# Altium PCB PCB2.PcbDoc
Units mm, origin at the board's own origin, x right, y up, seen from the top; angles counter-clockwise.
Board outline 42.3 x 42.3 mm, 2 copper layers (Top Layer, Bottom Layer); 22 components, 19 nets, 97 pads, 76 vias.
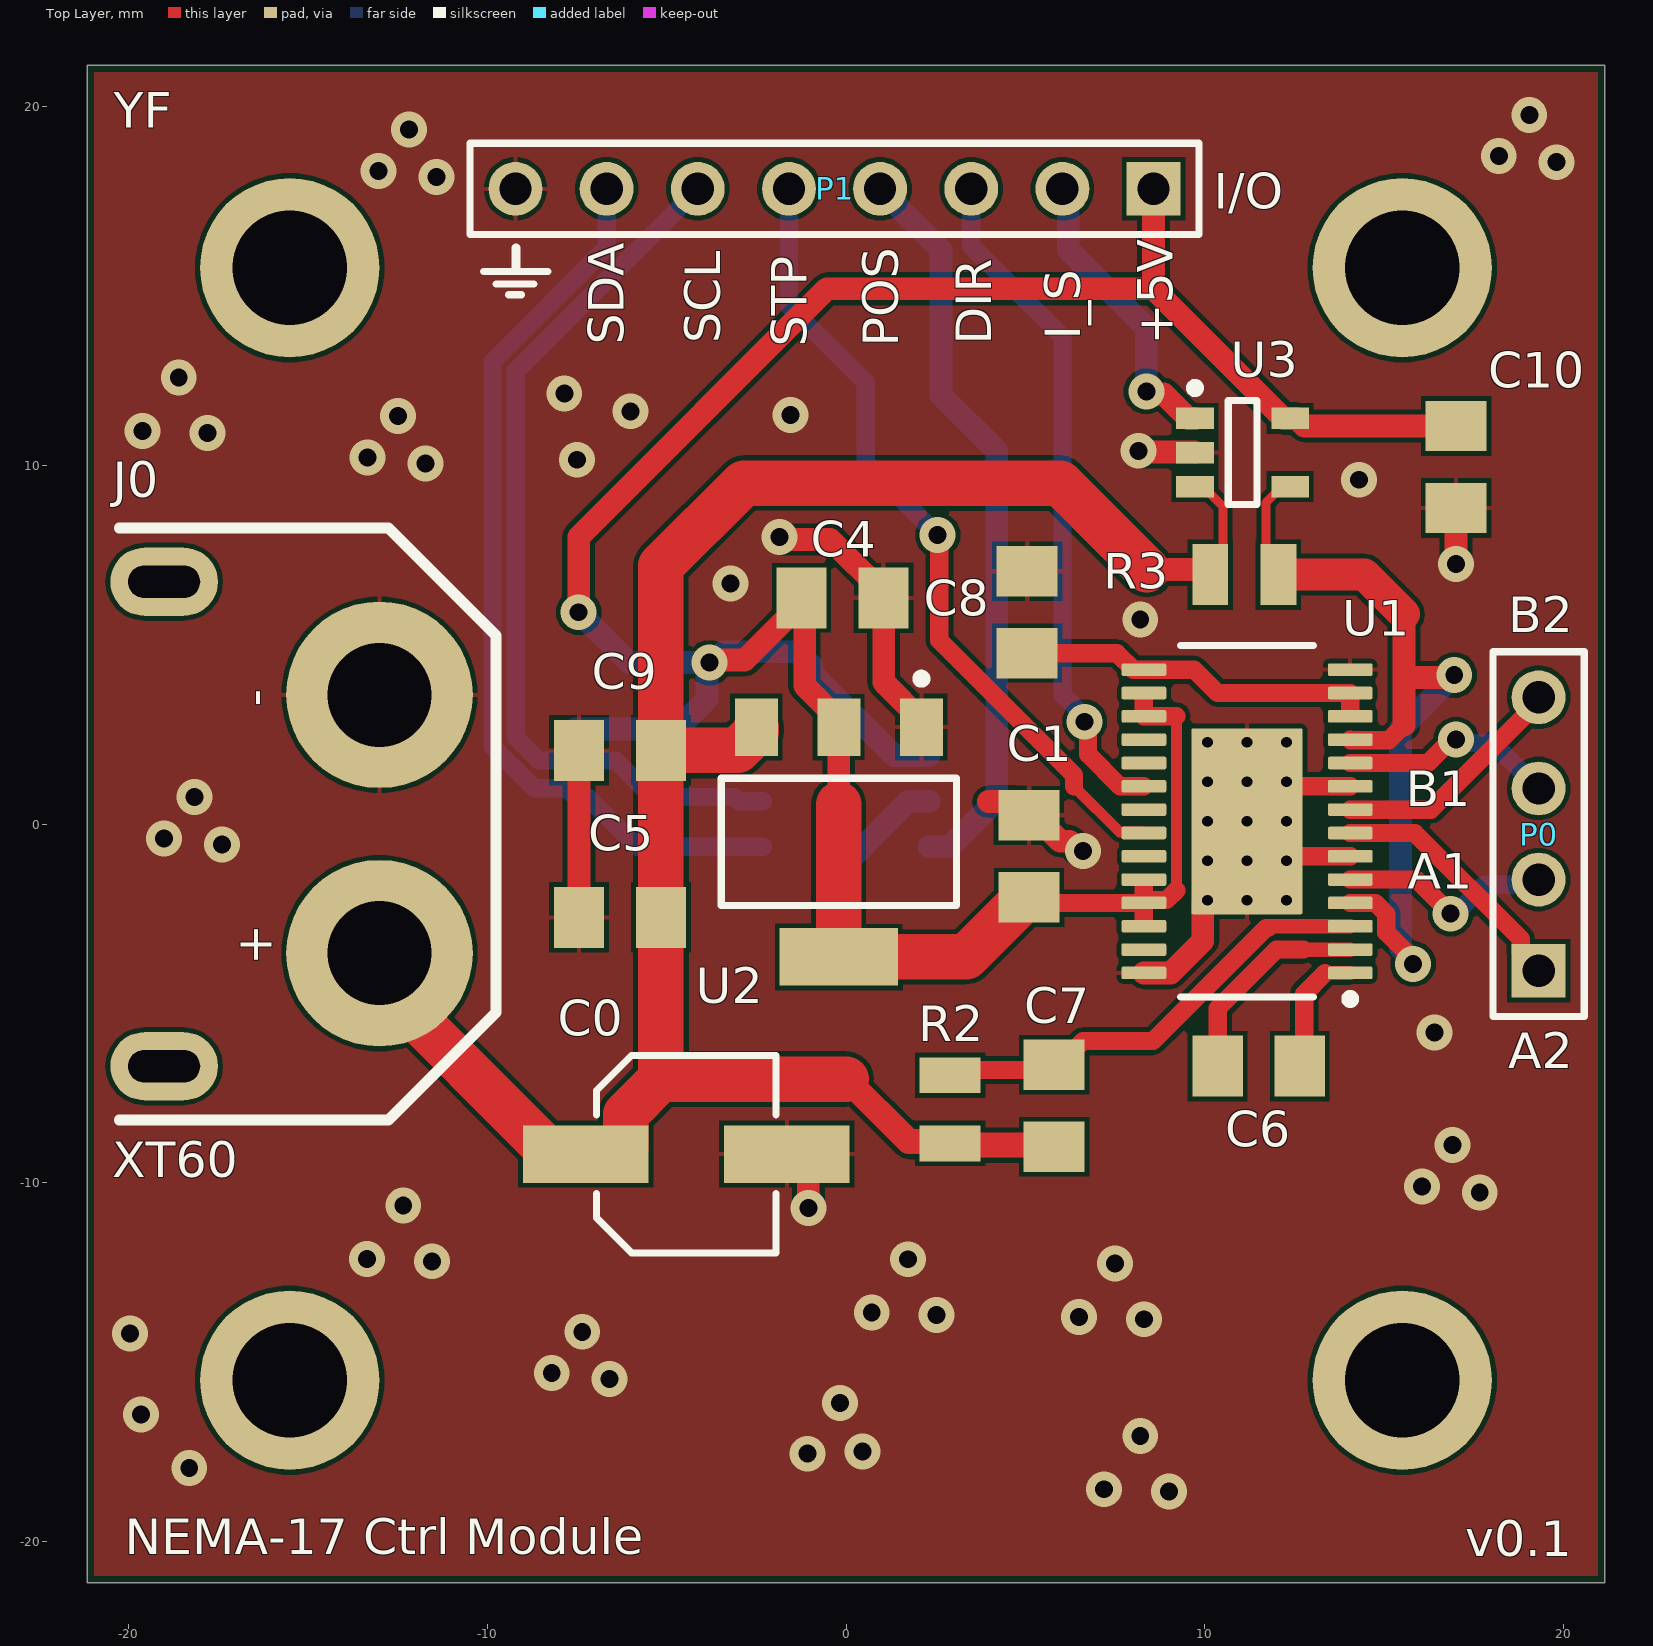
[diagram p0: Top Layer view]
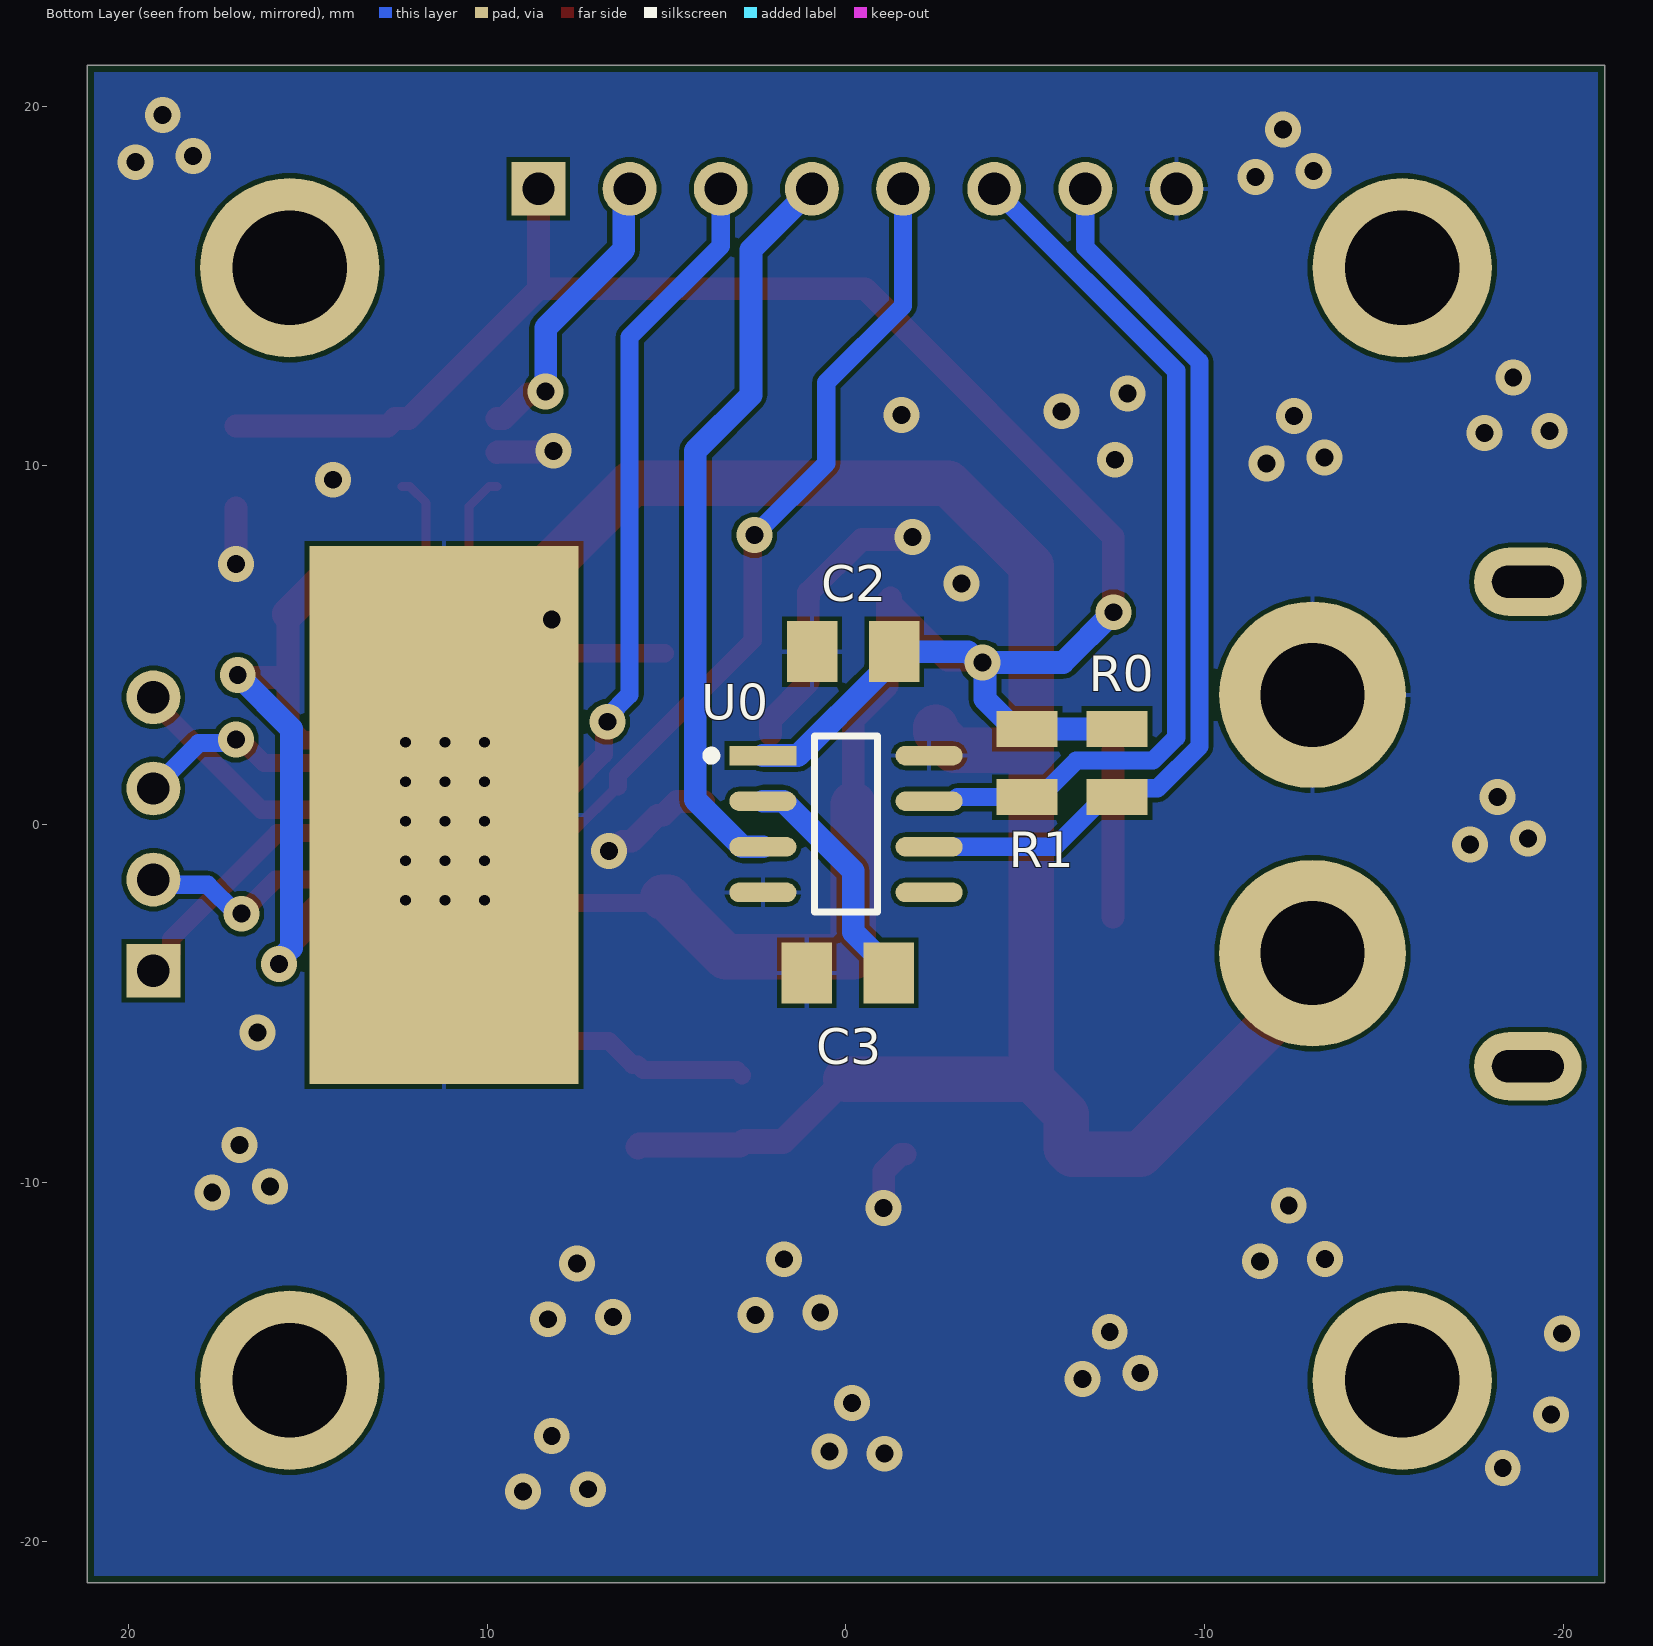
[diagram p1: Bottom Layer view, seen from below]
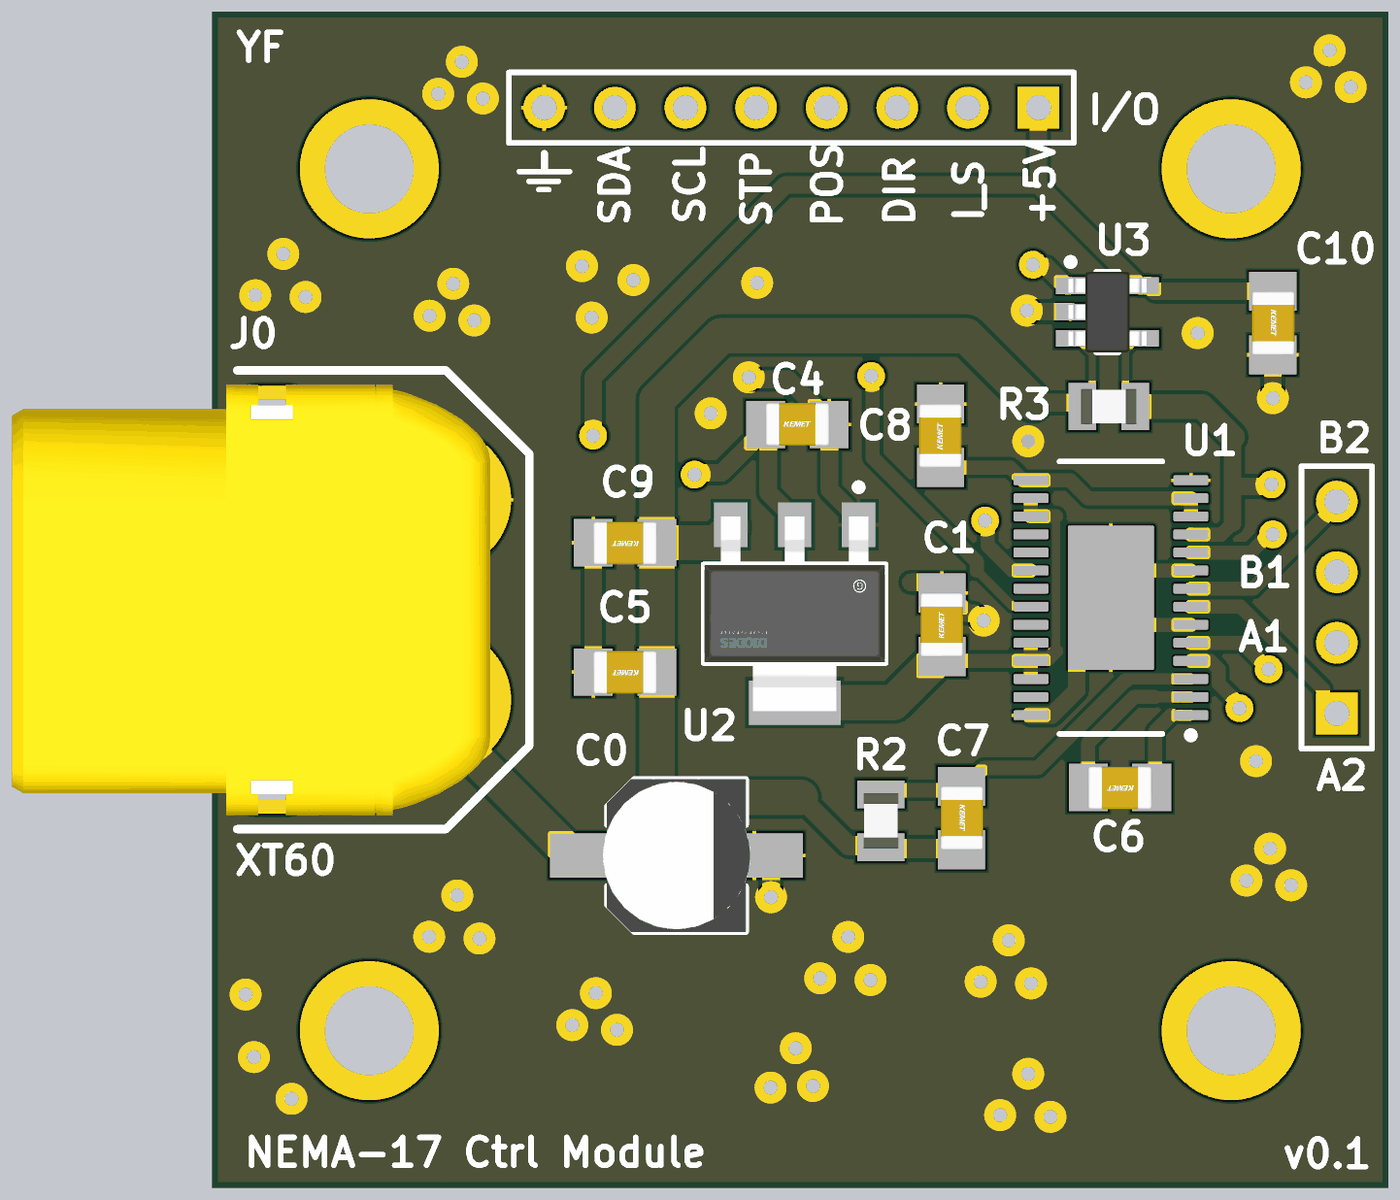
[diagram p2: 3D render of the assembled board from above, using the file's embedded part models]
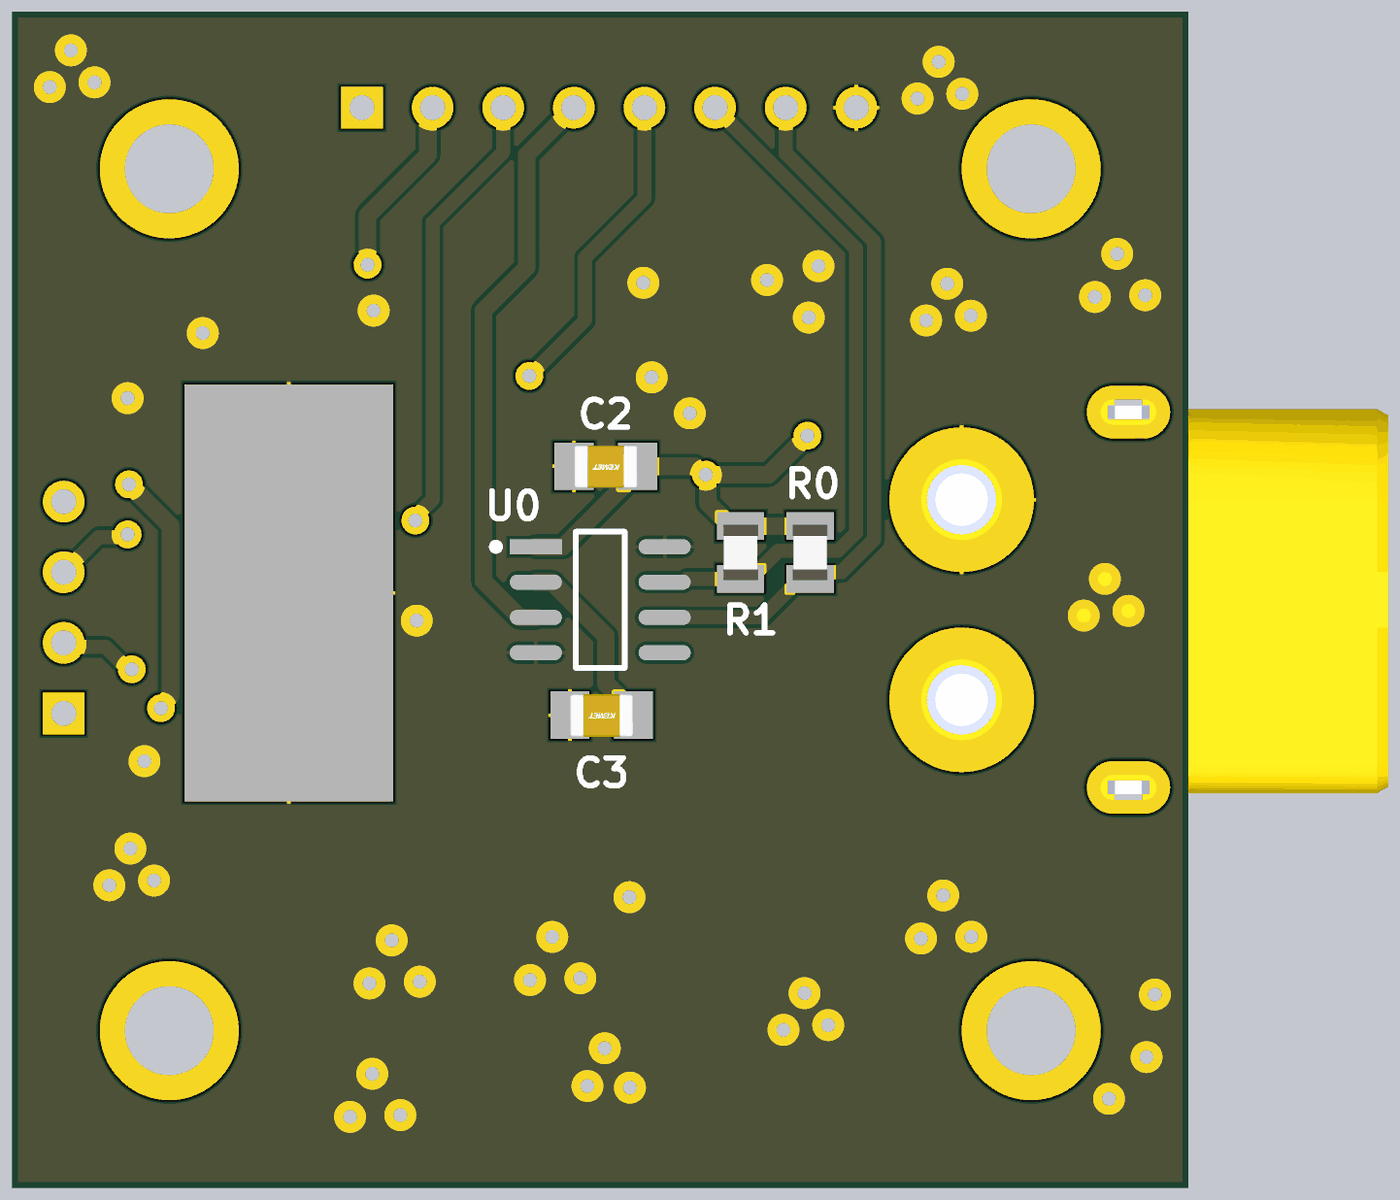
[diagram p3: 3D render of the assembled board from below, using the file's embedded part models]

## Layer stack, top to bottom
Top Solder: solder mask 0.0102, Solder Resist, Dk 3.5
Top Layer: signal copper 0.0356
Dielectric 1: dielectric 0.32, FR-4, Dk 4.8
Bottom Layer: signal copper 0.0356
Bottom Solder: solder mask 0.0102, Solder Resist, Dk 3.5

## Board outline
-21.15,-21.15 21.15,-21.15 21.15,21.15 -21.15,21.15

## Design rules (kind name [scope] priority, off if disabled: settings)
BoardOutlineClearance [All] p1: gap=0.2 ignorepadtopadclearanceinfootprint=FALSE
Clearance [All] p1: gap=0.127 ignorepadtopadclearanceinfootprint=FALSE except(0.25: Arc-Hole Track-Hole SMDPad-Hole THPad-Hole Via-Hole Fill-Hole Poly-Hole Region-Hole Text-Hole)
ComponentClearance [All] p1: gap=0.127 collisioncheckmode=3 verticalgap=0.127 showdistances=TRUE
DiffPairsRouting [All] p1: maxlimit=0.254 minlimit=0.127 mostfreqgap=0.127 toplayer_minwidth=0.127 toplayer_maxwidth=25.4 toplayer_prefwidth=0.127 bottomlayer_minwidth=0.127 bottomlayer_maxwidth=25.4 bottomlayer_prefwidth=0.127 maxuncoupledlength=12.7
Height [All] p1: minheight=0 maxheight=1816.048 prefheight=12.7
HoleSize [All] p1: absolutevalues=TRUE maxlimit=6.3 minlimit=0.3 maxpercent=80.000 minpercent=20.000
HoleToHoleClearance [All] p1: gap=0.25 allowstackedmicrovias=FALSE
MinimumAnnularRing [All] p1: minimumring=0.076
MinimumSolderMaskSliver [All] p1: minsoldermaskwidth=0
PlaneClearance [All] p1: clearance=0.127
PlaneConnect PlaneConnectPowerPads [InPadClass('PowerPads')] p1: planeconnectstyle=Direct reliefexpansion=0.508 reliefentries=4 reliefconductorwidth=0.254 reliefairgap=0.254
PlaneConnect [All] p2: pad.planeconnectstyle=Relief pad.reliefexpansion=0.3 pad.reliefentries=4 pad.reliefconductorwidth=0.127 pad.reliefairgap=0.127 via.planeconnectstyle=Direct via.reliefexpansion=0.3 via.reliefentries=4 via.reliefconductorwidth=0.127 via.reliefairgap=0.127
PolygonConnect PolygonConnectPowerPads [All vs (InPadClass('PowerPads'))] p1: connectstyle=Direct reliefconductorwidth=0.254 reliefentries=4 polygonreliefangle="90 Angle" airgapwidth=0.254
PolygonConnect [All] p2: thpad.connectstyle=Relief thpad.reliefconductorwidth=0.127 thpad.reliefentries=4 thpad.polygonreliefangle="90 Angle" thpad.airgapwidth=0.127 smdpad.connectstyle=Relief smdpad.reliefconductorwidth=0.127 smdpad.reliefentries=4 smdpad.polygonreliefangle="90 Angle" smdpad.airgapwidth=0.127 via.connectstyle=Direct via.reliefconductorwidth=0.127 via.reliefentries=4 via.polygonreliefangle="90 Angle" via.airgapwidth=0.127
RoutingVias [All] p1: holewidth=0.3 width=0.6 viastyle="Through Hole" minholewidth=0.3 minwidth=0.6 maxholewidth=0.6 maxwidth=6.6
SilkToSilkClearance [All] p1: silktosilkclearance=0
SilkToSolderMaskClearance [IsPad] p1: minsilkscreentomaskgap=0.127 clearancetoexposedcopper=TRUE
SolderMaskExpansion [All] p1: expansion=0.075 istentingtop=FALSE
Width [All] p1: maxlimit=25.4 minlimit=0.127 preferedwidth=0.127 minimp=50.000000 maximp=50.000000 favimp=50.000000
20 further rules are at their usual default settings.

## Components (designator, comment, footprint, x,y, rotation, side; value= is the part's Value field where it differs from the comment)
C0 "100u" CAP-EL-NP-5MM -4.45,-9.2 r0 top
C1 "22uF" CAP_0805 5.1,-0.9 r90 top
C2 "1uF" CAP_0805 -0.2,4.8 r0 bottom
C3 "0.1uF" CAP_0805 -0.05,-4.15 r0 bottom
C4 "0.1uF" CAP_0805 -0.1,6.3 r0 top
C5 "0.1uF" CAP_0805 -6.3,-2.6 r180 top
C6 "0.01uF" CAP_0805 11.5,-6.75 r180 top
C7 "0.1uF" CAP_0805 5.8,-7.85 r270 top
C8 "0.1uF" CAP_0805 5.05,5.9 r90 top
C9 "10uF" CAP_0805 -6.3,2.05 r180 top
C10 "0.1uF" CAP_0805 17,9.95 r270 top
J0 "XT60PW-F" XT60PW-F -16,0 r90 top
P0 "Stepper" HDR1X4 19.3,-4.09 r90 top
P1 "Header 8" HDR1X8 8.57,17.7 r180 top
R0 "R0805" RES_0805 -7.55,1.7 r270 bottom
R1 "R0805" RES_0805 -5.05,1.7 r270 bottom
R2 "1M" RES_0805 2.9,-7.95 r270 top
R3 ".5" RES_0805 11.1,6.95 r180 top
U0 "AS5600-ASOM" FP-AS5600-ASOM-IPC_C 0,0 r180 bottom
U1 "DRV8825PWP" PWP0028C_L 11.175,0.075 r180 top
U2 "AZ1117CH-5.0TRG1" FP-SOT223-MFG -0.2,-0.5 r270 top
U3 "INA180A1IDBVR" SOT-23-5 11.05,10.35 r0 top

## Footprints (in the part's own frame and the unit in brackets; to place one, negate y for a bottom-side part, rotate by r counter-clockwise, add the part's x,y. Pads: shape width x height; smd on the part's side, far side on the other; paste and mask are expansions set on the pad)
CAP-EL-NP-5MM [mm]
  rect 3.5x1.6 smd: 1(-2.8,0) 2(2.8,0)
  silkscreen extent -2.5,-2.75 2.5,2.75, body extent -2.65,-2.75 2.65,2.75, height 6.1
CAP_0805 [mm]
  rect 1.4x1.7 smd: 1(-1.143,0) 2(1.143,0)
  body extent -1.15,-0.76 1.15,0.79, height 1.01
FP-AS5600-ASOM-IPC_C [mm]
  rect 1.874x0.542 smd paste+0 mask+0: 1(-2.316,1.905)
  rrect100% 1.874x0.542 smd paste+0 mask+0: 2(-2.316,0.635) 3(-2.316,-0.635) 4(-2.316,-1.905) 5(2.316,-1.905) 6(2.316,-0.635) 7(2.316,0.635) 8(2.316,1.905)
  silkscreen extent -3.88,-2.45 0.88,2.45
FP-SOT223-MFG [mm]
  rect 1.6x1.2 smd paste+0 mask+0: 1(-3.2,2.3) 2(-3.2,0) 3(-3.2,-2.3)
  rect 1.6x3.3 smd paste+0 mask+0: 4(3.2,0)
  silkscreen extent -4.67,-3.27 1.78,3.27, body extent -4.1,-3.37 4.1,3.37, height 0.25
HDR1X4 [mm] "Connector; Header; 4 Position"
  rect 1.5x1.5 hole 0.9: 1(0,0)
  round 1.5 hole 0.9: 2(2.54,0) 3(5.08,0) 4(7.62,0)
  silkscreen extent -1.27,-1.27 8.89,1.27
HDR1X8 [mm] "Connector; Header; 8 Position"
  rect 1.5x1.5 hole 0.9: 1(0,0)
  round 1.5 hole 0.9: 2(2.54,0) 3(5.08,0) 4(7.62,0) 5(10.16,0) 6(12.7,0) 7(15.24,0) 8(17.78,0)
  silkscreen extent -1.27,-1.27 19.05,1.27
PWP0028C_L [mm] "SOP, 28-Leads, Body 9.8x4.5mm, Pitch 0.65mm, Thermal Pad 5.18x3.1mm, IPC High Density"
  rrect29% 1.25x0.35 smd: 1(-2.875,4.225) 2(-2.875,3.575) 3(-2.875,2.925) 4(-2.875,2.275) 5(-2.875,1.625) 6(-2.875,0.975) 7(-2.875,0.325) 8(-2.875,-0.325) 9(-2.875,-0.975) 10(-2.875,-1.625) 11(-2.875,-2.275) 12(-2.875,-2.925) 13(-2.875,-3.575) 14(-2.875,-4.225) 15(2.875,-4.225) 16(2.875,-3.575) 17(2.875,-2.925) 18(2.875,-2.275) 19(2.875,-1.625) 20(2.875,-0.975) 21(2.875,-0.325) 22(2.875,0.325) 23(2.875,0.975) 24(2.875,1.625) 25(2.875,2.275) 26(2.875,2.925) 27(2.875,3.575) 28(2.875,4.225)
  rrect3% 3.1x5.18 smd: 29(0,0)
  silkscreen extent -3,-4.9 1.85,5.07, body extent -2.25,-4.9 2.25,4.9, height 1.2
RES_0805 [mm]
  rect 1x1.7 smd: 1(-0.95,0) 2(0.95,0)
  body extent -1,-0.63 1,0.63, height 0.47
SOT-23-5 [mm] "SOT23, 5-Leads, Body 2,90x2,80mm, Pitch 0,95mm, IPC Medium Density"
  rect 1.05x0.6 smd: 1(-1.325,0.95) 2(-1.325,0) 3(-1.325,-0.95) 4(1.325,-0.95) 5(1.325,0.95)
  silkscreen extent -1.45,-1.45 0.4,1.92, body extent -1.4,-1.45 1.4,1.45, height 1.45
XT60PW-F [mm]
  round 5.2 hole 2.9: 1(-3.6,-3) 2(3.6,-3)
  oval 1.9x3 hole 0.9 slot 2 at 90 deg: MH(-6.75,3) MH(6.75,3)
  silkscreen extent -8.25,-6.25 8.25,4.25, body extent -7.75,-4.85 7.75,12.35, height 8.41

## Part data
C0: library part CAP_EL_NP_5MM, "Capacitor SMD Electrolytic Non-Polarised 5mm Diameter - 12V", Manufacturer=Nichicon
C1 C2 C3 C4 C8 C10: library part CAP_0805_6V3, "Capacitor SMD 0805 6V3"
C5 C9: library part CAP_0805_6V3, "Capacitor SMD 0805 12V"
C6: library part CAP_0805_6V3, "Capacitor SMD 0805 50V"
C7: library part CAP_0805_6V3, "Capacitor SMD 0805 16V"
J0: "XT60 horizontal female 2-pin AMASS", Manufacturer=AMASS, Distributor Link=https://www.tme.eu/de/details/xt60pw-f/dc-steckverbinder/amass/, Manufacturer Part Number=XT60PW-F
P0: library part "Header 4", "Header, 4-Pin", LatestRevisionDate=17-Jul-2002, LatestRevisionNote="Re-released for DXP Platform.", Publisher="Altium Limited"
P1: "Header, 8-Pin", LatestRevisionDate=17-Jul-2002, LatestRevisionNote="Re-released for DXP Platform.", Publisher="Altium Limited"
R0 R1 R2 R3: library part RES_0805, "Resistor SMD 0805"
U0: library part CMP-22826-000002-1, "SENSOR ANGLE 360DEG SMD", Max Operating Temperature=125°C, Min Operating Temperature=-40°C, Lead Free="Lead Free", Mount="Surface Mount", Sensing Method="Hall Effect", Termination=SMD/SMT
U1: library part CMP-1685-00019-1, "Stepper Motor Controller IC, 8.2 to 45 V, -40 to 85 degC, 28-Pin HTSSOP (PWP), Green (RoHS & no Sb/Br), Tube", Capacitance="47 uF", Case\Package=Radial, Max Operating Temperature="85 degC", Min Operating Temperature="-40 degC", Package Quantity=200, Tolerance=20%, Voltage Rating="100 V", ComponentLink1Description="Manufacturer URL", ComponentLink1URL=http://www.ti.com/, ComponentLink2Description=Datasheet, ComponentLink2URL=http://www.ti.com/general/docs/lit/getliterature.tsp?genericPartNumber=DRV8825&fileType=pdf, DatasheetVersion="SLVSA73F, 07/2014", Diameter="8 mm", Height="11.5 mm", Lead Pitch="3.5 mm", Length="11.5 mm", Mount="Through Hole", PackageDescription="28-Pin Small Outline Package Integrated Circuit, Body 9.7 x 4.4 mm, Pitch 0.65 mm", PackageReference=PWP0028C, Packaging=Bulk, Pins=2, Radiation Hardening=No, REACH SVHC="No SVHC", RoHSCompliant=true, Voltage Rating (DC)="100 V", Width="8 mm"
U2: library part CMP-12756-000028-1, "IC REG LINEAR 3.3V 800MA SOT223", Case/Package=SOT-223, Dropout Voltage=1.2V, Max Input Voltage=15V, Max Operating Temperature=125°C, Max Output Current=1.35A, Min Current Limit=1A, Min Operating Temperature=-20°C, Output Current=800mA, Output Voltage=3.3V, Package Quantity=4000, Power Supply Rejection Ratio (PSRR)=70dB, Quiescent Current=6mA, Reference Voltage=1.262V, Accuracy=1%, Height=1.7mm, Lead Free="Lead Free", Length=6.7mm, Mount="Surface Mount", Number of Outputs=1, Number of Pins=4, Number of Regulators=1, Output Type=Fixed, Packaging="Tape and Reel", Polarity=Positive, Width=3.7mm

## Free pads (board coordinates)
  round 5 hole 3.2: 1(-15.5,-15.5) 1(-15.5,15.5) 1(15.5,-15.5) 1(15.5,15.5)
  rect 7.5x15 smd far side: 3(11.2,0.25)

## Via types
v1: diameter 1, hole 0.5, Top Layer to Bottom Layer, 61 vias
v2: diameter 0.6, hole 0.3, Top Layer to Bottom Layer, 15 vias

## Nets (pads, with @x,y where several pads share a name; then routed paths per layer and width w, separated by ;. In a path a pad name is that pad's centre, name@x,y a point inside that pad or via, vN(x,y) a via of type N, cw(c..) or ccw(c..) an arc to the next point about the centre after c; other vN are vias at no path point)
+3V3: C8.1 U1.12 U1.13 U1.15 | length 10
  Top Layer w0.508: C8.1 7.551,4.757 8.008,4.3 U1.15 9.7,4.3 10.35,3.65 U1.13 U1.12@14.05,3.1
+5: C1.1 C2.1 C4.1 C10.1 P1.1 R0.1 R1.1 U0.1 U1.16 U1.17 U1.24 U1.25 U1.26 U2.2 U2.4 U3.5 | length 82
  Top Layer w0.305: 9.204,-1.846 9.204,3
  Top Layer w0.508: C1.1 5.257,-2.2 U1.25 ; U1.26@8.3,-2.75 U1.25 ; U1.24@8.3,-1.65 U1.25 ; U1.17 9.204,3 ; U1.17@8.3,3.1 U1.16@8.3,3.55 ; 9.204,-1.846 8.929,-2.121 8.379,-2.121 U1.25
  Top Layer w0.635: v1(-7.45,5.9) -7.45,8 -0.535,14.915 8.57,14.915 ; v1(-3.8,4.5) -3.73,4.57 -2.823,4.57 -1.243,6.15 C4.1 ; C4.1@-1.15,6.207 -1.15,3.85 -0.2,2.9 U2.2 -0.2,0.55 ; P1.1 8.57,14.915 ; C10.1 12.772,11.093 12.565,11.3 U3.5 12.185,11.3 8.57,14.915
  Top Layer w1.27: -0.2,0.55 U2.4 3.355,-3.7 4.885,-2.17 4.885,-2.108 4.95,-2.043 C1.1
  Bottom Layer w0.635: R0.1 R1.1 -4.7,2.65 -3.87,3.48 -3.87,4.43 v1(-3.8,4.5) ; v1(-7.45,5.9) -6.05,4.5 v1(-3.8,4.5) ; U0.1 1.345,1.905 -0.96,4.21 -0.96,4.417 C2.1 -3.401,4.8 -3.701,4.5 v1(-3.8,4.5)
+12: C0.1 C5.1 C7.2 C9.1 J0.1 R2.2 R3.2 U2.3 U3.3 | length 61.5
  Top Layer w0.254: U3.3 9.95,9.4 10.5,8.85 10.5,7.3 R3.2
  Top Layer w0.635: 8.383,7.088 10.012,7.088 R3.2
  Top Layer w0.7: 0.007,-7.107 1.75,-8.85 2.85,-8.85 R2.2 2.947,-8.946 5.754,-8.946 C7.2
  Top Layer w1.27: J0.1 -13,-4.4 -8.2,-9.2 C0.1 -6.3,-9.2 -6.135,-9.035 -6.135,-8.085 -5.157,-7.107 ; U2.3 -2.5,2.57 -3.02,2.05 C9.1 ; 0.007,-7.107 -5.157,-7.107 ; 8.383,7.088 5.97,9.5 -2.85,9.5 -5.157,7.193 C9.1 ; -5.157,-7.107 C5.1 C9.1
DIR: P1.3 U1.20 | length 19
  Top Layer w0.508: v1(6.65,2.85) 6.744,2.756 6.744,1.947 7.641,1.05 U1.20
  Bottom Layer w0.508: P1.3 3.49,16.11 6.03,13.57 6.03,3.603 6.65,2.983 v1(6.65,2.85)
GND: C0.2 C1.2 C2.2 C3.2 C4.2 C5.2 C8.2 C9.2 C10.2 J0.2 P1.8 pad.3 U0.4 U0.8 U1.6 U1.9 U1.14 U1.28 U1.29 U2.1 U3.2 | length 30.3
  Top Layer w0.508: v2(11.175,0.075) 12.15,1.05 U1.9 ; v2(12.275,-1.025) 12.4,-0.9 U1.6
  Top Layer w0.635: J0.2 J0.2@-11.765,3.6 ; C5.2 C9.2 ; v1(-1.85,8) -1.78,7.93 -0.437,7.93 1.043,6.45 C4.2 1.05,6.293 1.05,3.95 2.1,2.9 U2.1 U2.1@2.1,2.5 ; C0.2 -1.533,-9.2 -1.05,-9.683 v1(-1.05,-10.7) ; 3.975,0.626 4.717,0.626 C1.2 5.25,0.243 5.973,-0.48 6.231,-0.48 6.501,-0.75 v1(6.6,-0.75) ; v1(8.15,10.4) 8.183,10.368 9.707,10.368 U3.2 ; U1.28 9.05,-4.15 9.942,-3.258 9.942,-2.198 10.015,-2.125 v2(10.075,-2.125) ; v1(17,7.25) C10.2
  other v1: 9,-18.6 7.19,-18.537 -18.3,-17.95 -1.068,-17.547 0.461,-17.491 8.2,-17.05 -19.65,-16.45 -0.162,-16.132 -6.591,-15.47 -8.2,-15.3 -19.95,-14.2 -7.35,-14.15 8.3,-13.8 6.49,-13.737 2.527,-13.678 0.717,-13.615 7.5,-12.25 -11.537,-12.185 1.727,-12.128 -13.347,-12.122 -12.337,-10.635 17.659,-10.27 16.05,-10.1 16.9,-8.95 16.395,-5.806 -17.391,-0.57 -19,-0.4 -18.15,0.75 8.2,5.7 -3.222,6.705 14.296,9.592 -11.722,10.046 -7.5,10.15 -13.331,10.216 -17.794,10.891 -19.604,10.954 -12.481,11.366 -1.55,11.4 -6,11.5 -7.85,12 -18.594,12.441 -11.413,18.029 -13.022,18.2 19.8,18.441 18.19,18.612 -12.172,19.349 19.04,19.762
  other v2: 11.175,-2.125 12.275,-2.125 10.075,-1.025 11.175,-1.025 10.075,0.075 12.275,0.075 10.075,1.175 11.175,1.175 12.275,1.175 10.075,2.275 11.175,2.275 12.275,2.275
Is: P1.2 U3.1 | length 8.3
  Top Layer w0.635: v1(8.369,12.052) 8.439,11.982 8.853,11.982 9.535,11.3 U3.1
  Bottom Layer w0.635: P1.2 6.196,17.534 6.196,16.004 8.369,13.831 v1(8.369,12.052)
NetC3_1: C3.1 U0.2 | length 6.6
  Bottom Layer w0.635: C3.1 -1.193,-4 -0.2,-3.007 -0.2,-1.308 1.743,0.635 U0.2
NetC6_1: C6.1 U1.1 | length 3.6
  Top Layer w0.4: 13.35,-4.15 U1.1
  Top Layer w0.508: C6.1 12.77,-6.623 12.77,-4.73 13.35,-4.15
NetC6_2: C6.2 U1.2 | length 6
  Top Layer w0.4: 12.75,-3.5 U1.2
  Top Layer w0.508: C6.2 10.357,-5.143 12,-3.5 12.75,-3.5
NetC7_1: C7.1 R2.1 U1.3 | length 12.9
  Top Layer w0.4: 11.752,-2.896 11.798,-2.85 U1.3
  Top Layer w0.508: R2.1 3.047,-6.853 5.654,-6.853 C7.1 5.95,-6.707 6.607,-6.05 8.552,-6.05 11.706,-2.896 11.752,-2.896
NetP0_1: P0.1 U1.7 | length 7.1
  Top Layer w0.508: U1.7 15.846,-0.25 18.804,-3.208 18.804,-3.594 P0.1
NetP0_2: P0.2 U1.5 | length 6
  Top Layer w0.508: U1.5 15.9,-1.55 v1(16.85,-2.5)
  Bottom Layer w0.508: v1(16.85,-2.5) 16.983,-2.5 17.788,-1.695 19.155,-1.695 P0.2
NetP0_3: P0.3 U1.10 | length 6.1
  Top Layer w0.508: U1.10 16.217,1.7 16.867,2.35 v1(17,2.35)
  Bottom Layer w0.508: v1(17,2.35) 17.094,2.256 18.034,2.256 P0.3
NetP0_4: P0.4 U1.8 | length 6.6
  Top Layer w0.508: U1.8 16.296,0.4 19.3,3.404 P0.4
NetR3_1: R3.1 U1.4 U1.11 U3.4 | length 24.8
  Top Layer w0.254: R3.1 11.7,7.3 11.7,8.95 12.15,9.4 U3.4
  Top Layer w0.508: U1.4 14.75,-2.2 15.056,-2.506 15.056,-3.023 15.8,-3.767 v1(15.8,-3.9) ; U1.11 14.065,2.335 15.127,2.335 15.55,2.758
  Top Layer w0.635: 15.55,2.758 15.55,4.05 ; 15.55,5.85 15.55,4.05 ; v1(16.95,4.15) 16.88,4.08 15.58,4.08 15.55,4.05
  Top Layer w0.889: R3.1 14.45,6.95 15.55,5.85
  Bottom Layer w0.635: v1(15.8,-3.9) 15.8,-3.801 15.455,-3.457 15.455,2.655 v1(16.95,4.15)
POS: P1.4 U0.3 | length 20.8
  Bottom Layer w0.635: P1.4 2.65,16 2.65,11.95 4.2,10.4 4.2,0.676 2.889,-0.635 U0.3
SCL: P1.6 R1.2 U0.7 | length 25
  Bottom Layer w0.508: P1.6 -9.2,12.63 -9.2,2.411 -8.558,1.769 -6.419,1.769 -5.4,0.75 R1.2 -3.106,0.75 -2.991,0.635 U0.7
SDA: P1.7 R0.2 U0.6 | length 25.5
  Bottom Layer w0.508: P1.7 -6.67,16.058 -9.85,12.878 -9.85,2.163 -8.683,0.996 -7.796,0.996 R0.2 -7.2,0.75 -5.815,-0.635 U0.6
STEP: P1.5 U1.22 | length 22.4
  Top Layer w0.305: 6.35,1.05 7.627,-0.227 8.277,-0.227 U1.22
  Top Layer w0.508: v1@2.6,8 2.6,5.118 6.35,1.368 6.35,1.05
  Bottom Layer w0.508: P1.5 -1.59,14.44 0.55,12.3 0.55,10.05 v1(2.55,8.05)
pads on no net: J0.MH U0.5 U1.18 U1.19 U1.21 U1.23 U1.27

## Polygon pours and split planes (outlines as drawn)
GND on Bottom Layer "GND_L02_P000" (solid, pour order 0): -21.2,21.2 21.2,21.2 21.2,-21.05 21.15,-21.1 -21.25,-21.1
GND on Top Layer "GND_L01_P001" (solid, pour order 1): -21.15,21.15 -21.1,21.2 21.15,21.2 21.15,-21.05 21.1,-21.1 -21.2,-21.1

## Silkscreen, mask and mechanical layers (free items; w line width, h text height)
Top Overlay:
  lines w0.2: -10.1,15.4 -8.3,15.4 ; -9.75,15.05 -8.7,15.05 ; -9.4,14.75 -9.05,14.75
  lines w0.254: -9.2,15.45 -9.2,16.05
  text "YF" at -20.4,19.4 h1
  text "I/O" at 10.25,17.15 h1
  text "I_S" at 6.533,13.5 h1 r90
  text "SCL" at -3.5,13.4 h1 r90
  text "SDA" at -6.2,13.35 h1 r90
  text "DIR" at 4.05,13.35 h1 r90
  text "+5V" at 9.1,13.35 h1 r90
  text "STP" at -1.1,13.3 h1 r90
  text "POS" at 1.45,13.3 h1 r90
  text "B2" at 18.45,5.35 h1
  text "B1" at 15.6,0.5 h1
  text "A1" at 15.65,-1.8 h1
  text "A2" at 18.45,-6.8 h1
  text "XT60" at -20.45,-9.85 h1
  text "NEMA-17 Ctrl Module" at -20.1,-20.35 h1
  text "v0.1" at 17.25,-20.4 h1

## Text inside footprints (layer, text, board x,y; h text height)
J0: Mechanical 13 "+" at -16,-3.933 h1 r90; Mechanical 13 "-" at -16,3.267 h1 r90; Top Overlay "-" at -16,3.267 h1 r90; Top Overlay "+" at -16,-3.933 h1 r90